# Altium PCB PCB_DA1_FIN_2023-05-31.pcbdoc
Units mil, origin at the board's own origin, x right, y up, seen from the top; angles counter-clockwise.
Board outline 3710.94 x 3713.54 mil, 2 copper layers (Top Layer, Bottom Layer); 16 components, 29 nets, 83 pads, 28 vias.
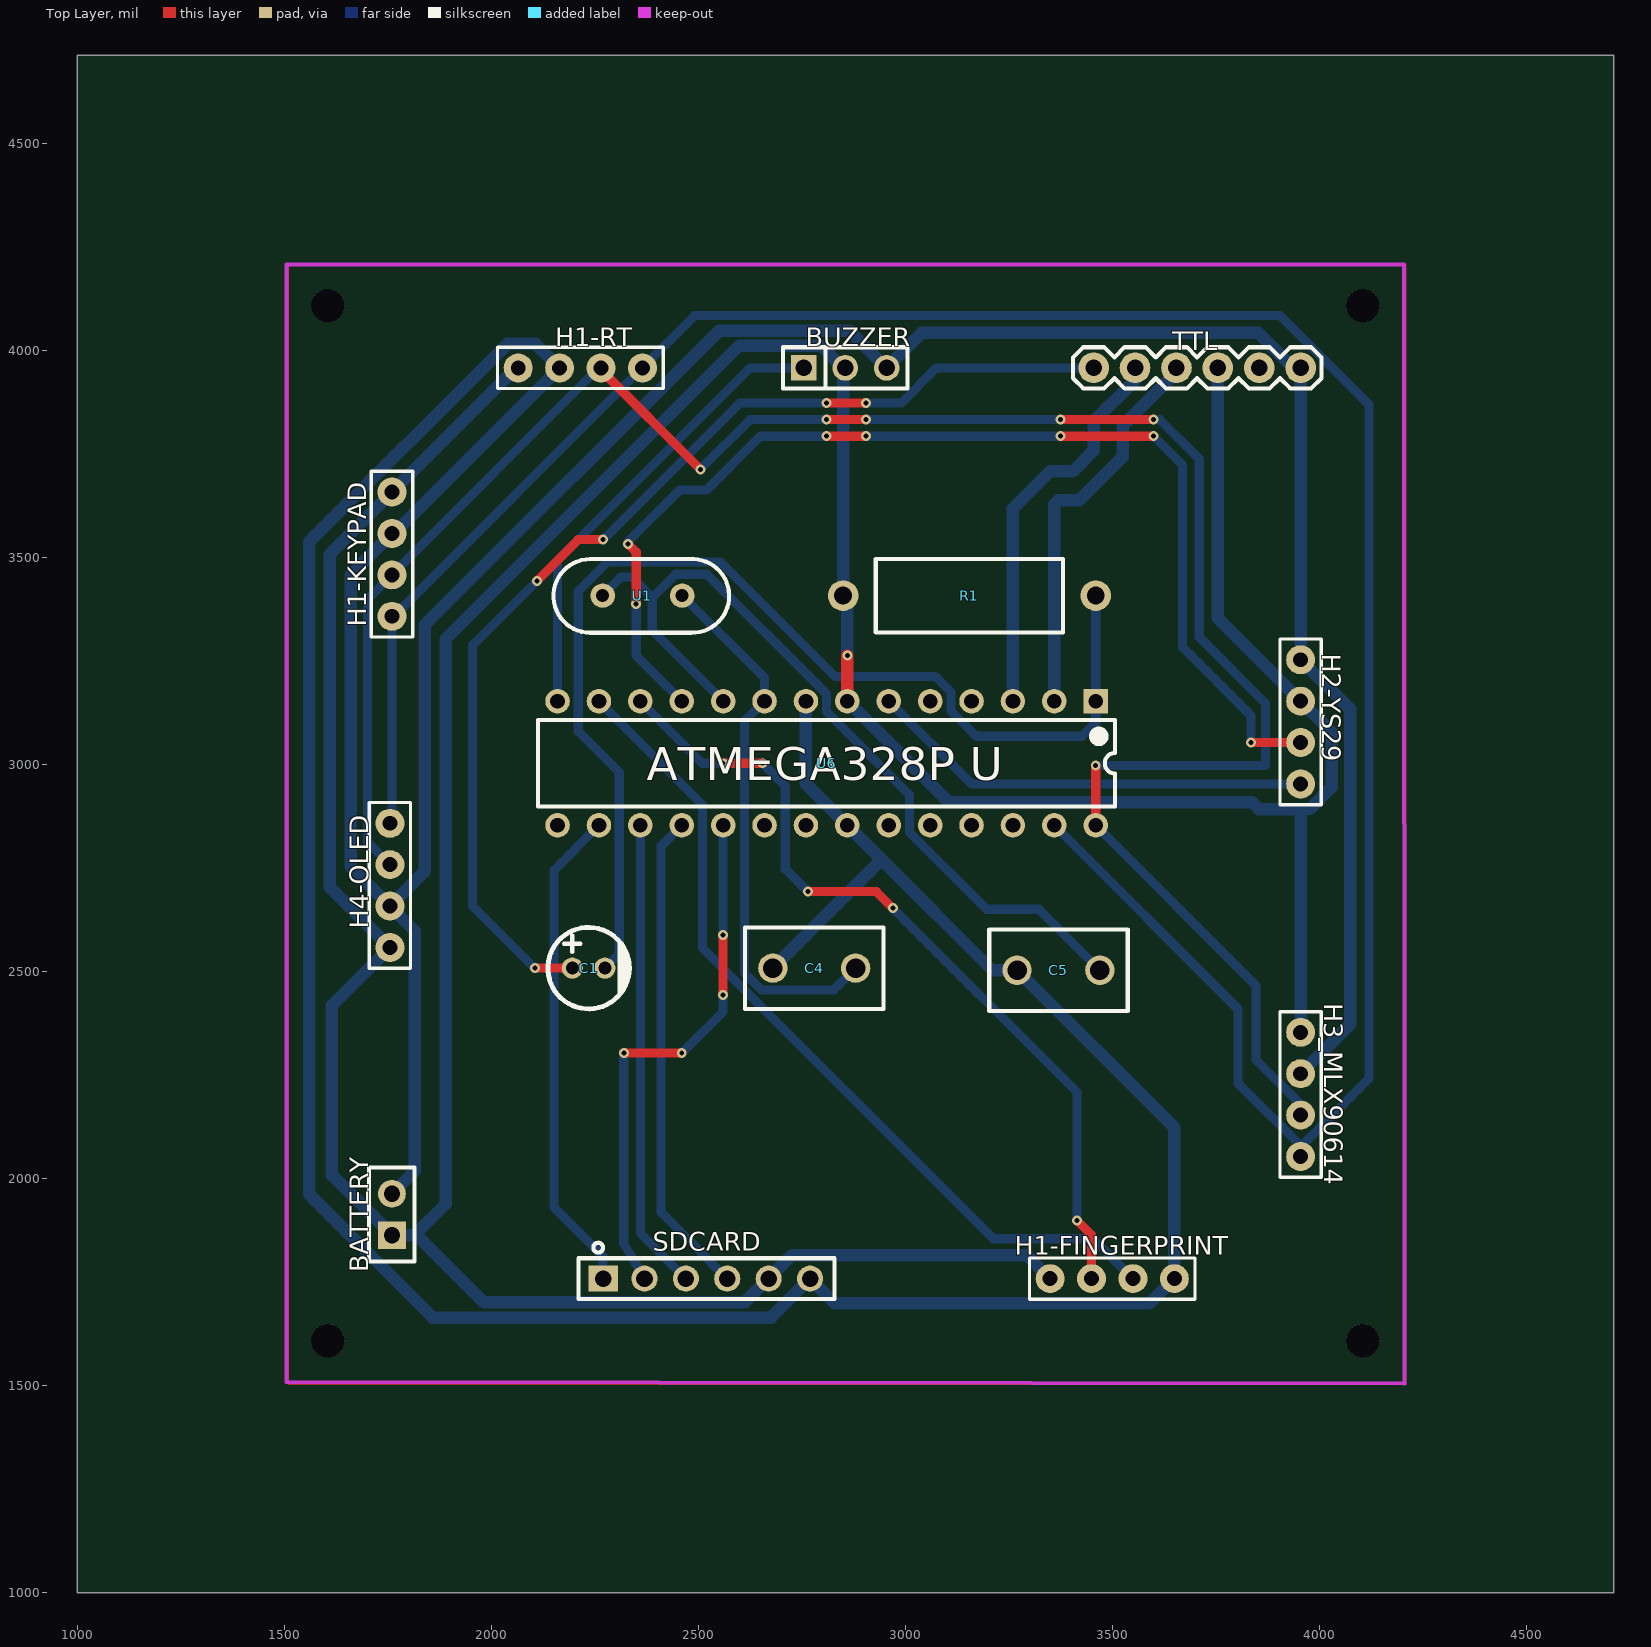
[diagram p0: Top Layer view]
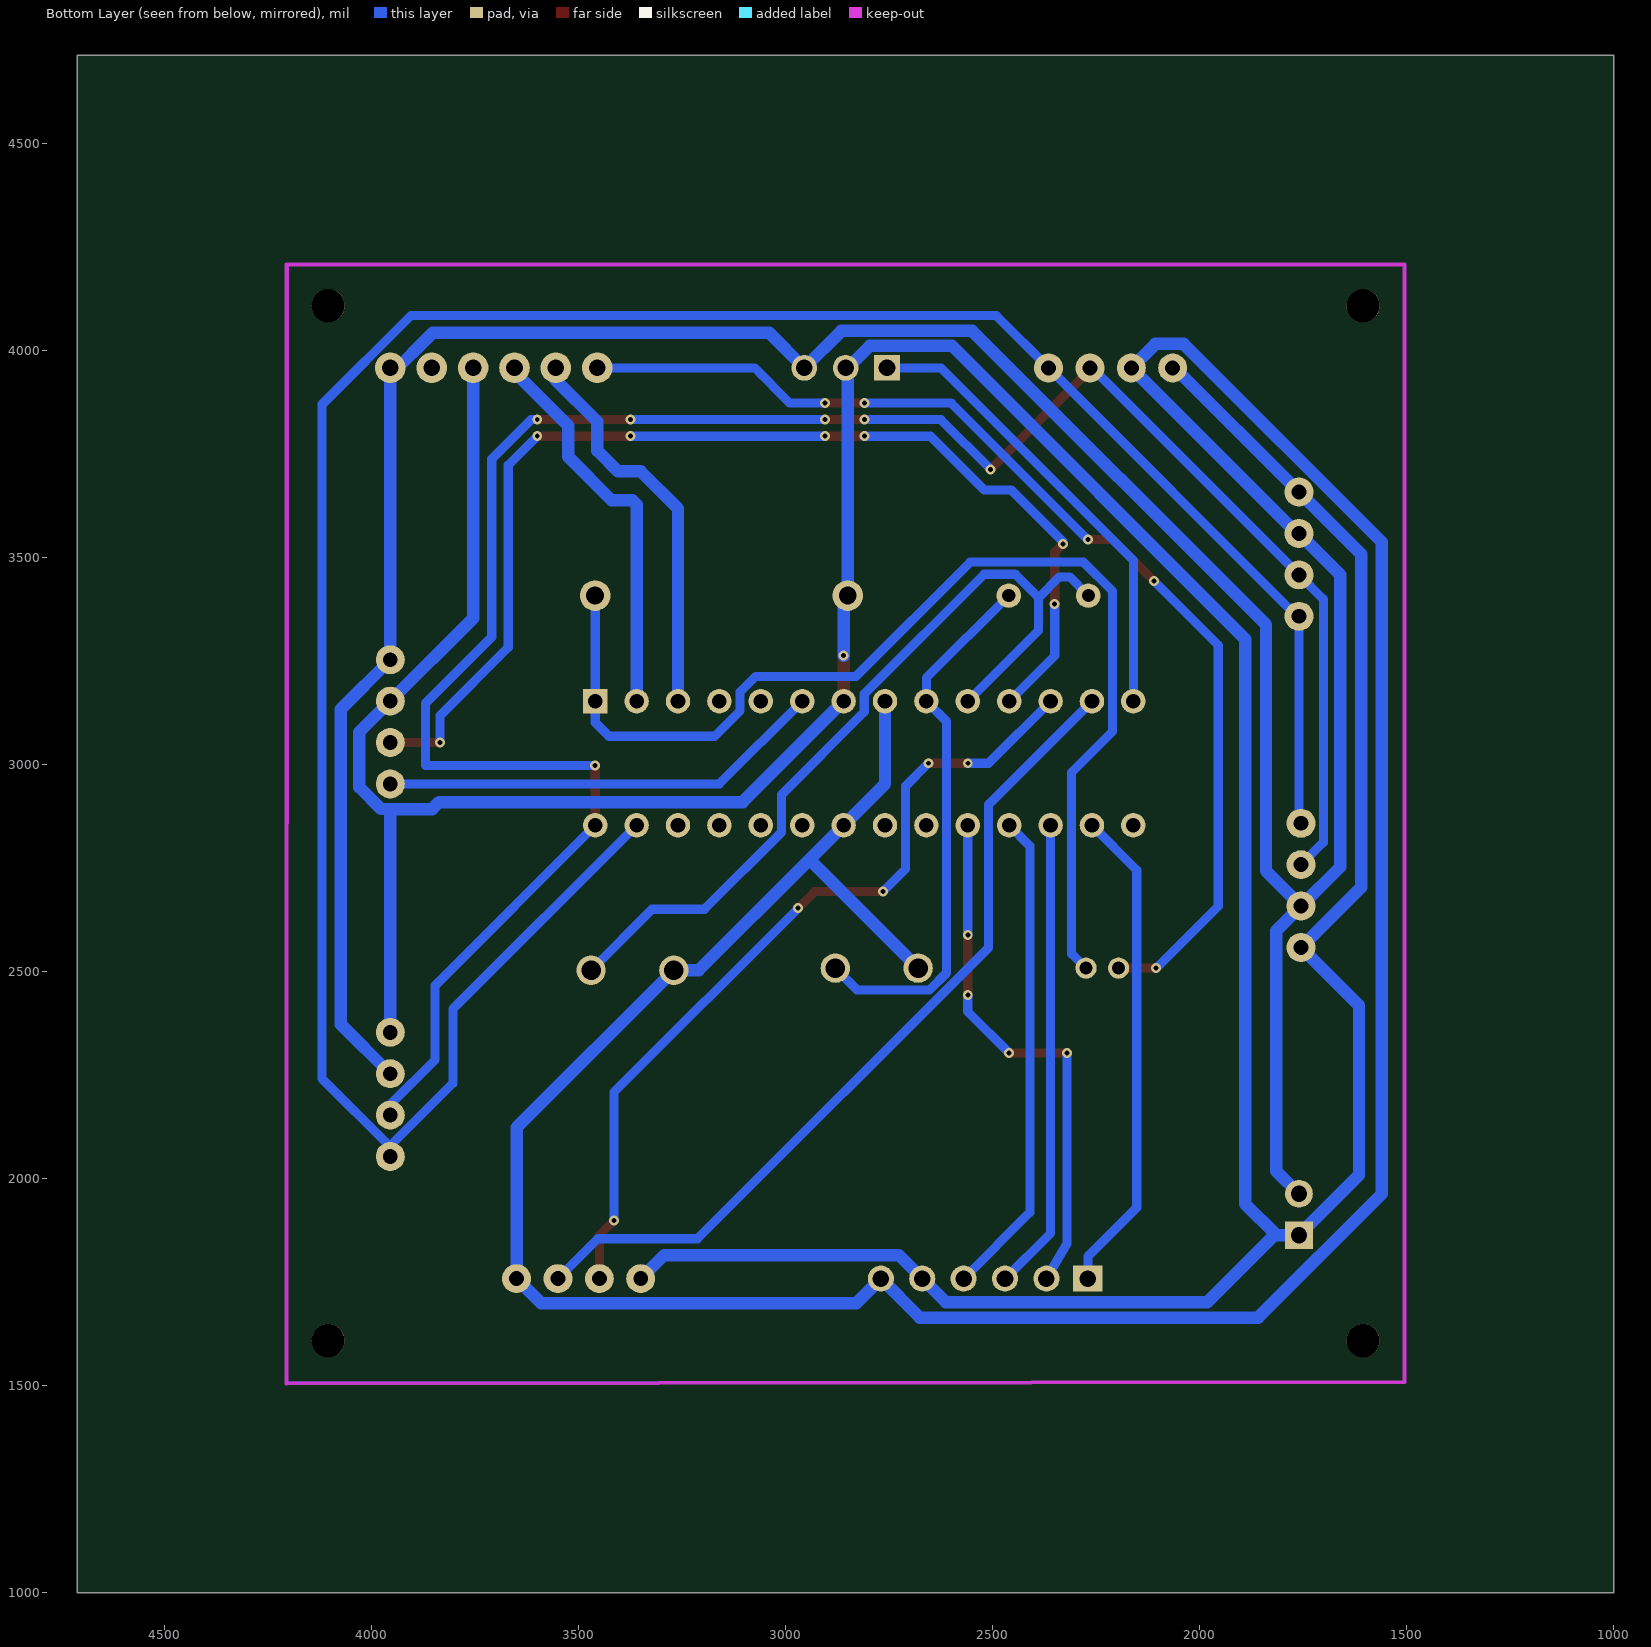
[diagram p1: Bottom Layer view, seen from below]

## Layer stack, top to bottom
Top Layer: signal copper (thickness not stored)
Dielectric: dielectric 12.6, FR-4, Dk 4.8
Bottom Layer: signal copper (thickness not stored)

## Board outline
4710.94,1000 1000,1000 1000,4713.54 4710.94,4713.54

## Components (designator, comment, footprint, x,y, rotation, side; value= is the part's Value field where it differs from the comment)
BATTERY "Header-Female-2.54_1x2" HDR-TH_2P-P2.54-V-F 1760,1913.54 r90 top
BUZZER "Header-Female-2.54_1x3" HDR-TH_3P-P2.54-V-F 2855,3958.54 r0 top
C1 "100nF" CAP-TH_BD5.0-P2.00-D0.8-FD 2235,2508.54 r0 top
C4 "22pF" CAP-TH_L8.5-W5.0-P5.00-D1.2 2780,2508.54 r0 top
C5 "22pF" CAP-TH_L8.5-W5.0-P5.00-D1.2 3370,2503.54 r0 top
H1-FINGERPRINT "HEADER-FEMALE-2.54_1X4 CP" "HEADER - HEADER-FEMALE-2.54_1X4" 3450,1758.54 r0 top
H1-KEYPAD "HEADER-FEMALE-2.54_1X4 CP" "HEADER - HEADER-FEMALE-2.54_1X4" 1760,3558.54 r270 top
H1-RT "HEADER-FEMALE-2.54_1X4 CP" "HEADER - HEADER-FEMALE-2.54_1X4" 2165,3958.54 r0 top
H2-YS29 "HEADER-FEMALE-2.54_1X4 CP" "HEADER - HEADER-FEMALE-2.54_1X4" 3955,3153.54 r270 top
H3_MLX90614 "HEADER-FEMALE-2.54_1X4 CP" "HEADER - HEADER-FEMALE-2.54_1X4" 3955,2253.54 r270 top
H4-OLED "HEADER-FEMALE-2.54_1X4 CP" "HEADER - HEADER-FEMALE-2.54_1X4" 1755,2658.54 r90 top
R1 "10kΩ" RES-TH_BD4.5-L11.5-P15.50-D0.7 3155,3408.54 r0 top
SDCARD "Header-Female-2.54_1x6" HDR-TH_6P-P2.54-V-F 2520,1758.54 r0 top
TTL "FTDI_BASIC" FTDI_BASIC 3455,3958.54 r0 top
U1 "16MHz" CRYSTAL-TH_L10.8-W4.5-P4.88 2365,3408.54 r0 top
U6 "ATmega328PU" "DIP-28 ATMEGA328P U" 2160,2853.54 r0 top

## Footprints (in the part's own frame and the unit in brackets; to place one, negate y for a bottom-side part, rotate by r counter-clockwise, add the part's x,y. Pads: shape width x height; smd on the part's side, far side on the other; paste and mask are expansions set on the pad)
CAP-TH_BD5.0-P2.00-D0.8-FD [mm]
  round 1.3 hole 0.8: 1(-1,0) 2(1,0)
  silkscreen extent -2.5,-2.5 2.5,2.5
CAP-TH_L8.5-W5.0-P5.00-D1.2 [mm]
  round 1.8 hole 1.2: 1(-2.54,0) 2(2.54,0)
  silkscreen extent -4.25,-2.5 4.25,2.5
CRYSTAL-TH_L10.8-W4.5-P4.88 [mm]
  round 1.5 hole 0.8: 1(-2.44,0) 2(2.44,0)
  silkscreen extent -5.46,-2.28 5.32,2.24
"DIP-28 ATMEGA328P U" [mm]
  rect 1.5x1.5 hole 0.9: 1(33.02,7.62)
  round 1.5 hole 0.9: 2(30.48,7.62) 3(27.94,7.62) 4(25.4,7.62) 5(22.86,7.62) 6(20.32,7.62) 7(17.78,7.62) 8(15.24,7.62) 9(12.7,7.62) 10(10.16,7.62) 11(7.62,7.62) 12(5.08,7.62) 13(2.54,7.62) 14(0,7.62) 15(0,0) 16(2.54,0) 17(5.08,0) 18(7.62,0) 19(10.16,0) 20(12.7,0) 21(15.24,0) 22(17.78,0) 23(20.32,0) 24(22.86,0) 25(25.4,0) 26(27.94,0) 27(30.48,0) 28(33.02,0)
  silkscreen extent -1.19,1.16 34.21,6.46
FTDI_BASIC [mil]
  round 74 hole 40: CTS(400,0) DTR(0,0) GND(500,0) RXI(100,0) TXO(200,0) VCC(300,0)
  silkscreen extent -50,-50 550,50
HDR-TH_2P-P2.54-V-F [mm]
  rect 1.7x1.7 hole 1: 1(-1.27,0)
  round 1.7 hole 1: 2(1.27,0)
  silkscreen extent -2.88,-1.39 2.88,1.4
HDR-TH_3P-P2.54-V-F [mil]
  rect 62x62 hole 40.16: 1(-100,0)
  round 62 hole 40.16: 2(0,0) 3(100,0)
  silkscreen extent -150,-50 150,50
HDR-TH_6P-P2.54-V-F [mm]
  rect 1.8x1.6 hole 1.02: 1(-6.35,0)
  round 1.6 hole 1.02: 2(-3.81,0) 3(-1.27,0) 4(1.27,0) 5(3.81,0) 6(6.35,0)
  silkscreen extent -7.85,-1.25 7.85,2.2
"HEADER - HEADER-FEMALE-2.54_1X4" [mil]
  round 70 hole 36: 1(-100,0) 2(0,0) 3(100,0) 4(200,0)
  silkscreen extent -150,-50 250,50
RES-TH_BD4.5-L11.5-P15.50-D0.7 [mil]
  round 74 hole 43.31: 1(-305.12,0) 2(305.12,0)
  silkscreen extent -226,-89 226,89

## Free pads (board coordinates)
  round 80 hole 80 unplated: ""(1605,1608.54) ""(1605,4108.54) ""(4105,1608.54) ""(4105,4108.54)

## Via types
v1: diameter 24, hole 12, Top Layer to Bottom Layer, tented both sides, 28 vias

## Nets (pads, with @x,y where several pads share a name; then routed paths per layer and width w, separated by ;. In a path a pad name is that pad's centre, name@x,y a point inside that pad or via, vN(x,y) a via of type N, cw(c..) or ccw(c..) an arc to the next point about the centre after c; other vN are vias at no path point)
+5V: BATTERY.1 BUZZER.2 H1-FINGERPRINT.1 H1-KEYPAD.1 H1-RT.1 H2-YS29.2 H3_MLX90614.1 H4-OLED.1 R1.1 SDCARD.5 TTL.VCC U6.7 | length 10719.1
  Top Layer w30: U6.7 v1(2860,3263.54)
  Bottom Layer w30: 1814.5,1863.54 1890,1939.04 1890,3303.54 2598.5,4012.04 2796.3,4012.04 BUZZER.2@2849.9,3958.54 ; H1-RT.1 2060,3958.54 H1-KEYPAD.1 1610,3508.54 1610,2703.54 H4-OLED.1 1615,2418.54 1615,2008.54 BATTERY.1 1778.26,1863.54 1808.01,1863.54 1814.54,1863.54 1819.5,1863.54 1981.35,1701.69 2613.15,1701.69 SDCARD.5 2726.74,1815.28 3293.26,1815.28 H1-FINGERPRINT.1 ; BUZZER.2 BUZZER.2@2849.88,3958.54 ; U6.7 3103.92,2909.62 3837.33,2909.62 3854.05,2892.9 3955,2892.9 H3_MLX90614.1 ; v1(2860,3263.54) 2860,3398.42 R1.1 BUZZER.2@2849.88,3958.54 ; TTL.VCC 3755,3353.54 H2-YS29.2 4030,3078.54 4030,2945.64 3977.3,2892.94 3955,2892.94
AREF: U6.21
AVCC: U6.20
DTR: C1.1 TTL.DTR | length 3118.6
  Top Layer w22: v1(2105,2508.54) C1.1 ; v1(2110,3443.54) 2210,3543.54 v1(2270,3543.54) ; v1(2810,3873.54) v1(2905,3873.54)
  Bottom Layer w22: v1(2105,2508.54) 1955,2658.54 1955,3288.54 v1(2110,3443.54) ; v1(2270,3543.54) 2600,3873.54 v1(2810,3873.54) ; v1(2905,3873.54) 2990,3873.54 3075,3958.54 ; 3055,3938.54 3075,3958.54 ; 3075,3958.54 TTL.DTR 3075,3958.54
GND: BATTERY.2 BUZZER.3 C4.1 C5.1 H1-FINGERPRINT.4 H1-KEYPAD.2 H1-RT.2 H2-YS29.1 H3_MLX90614.2 H4-OLED.2 SDCARD.6 TTL.GND U6.8 U6.22 | length 14215.4
  Bottom Layer w30: BATTERY.2 1815.04,2018.58 1815.04,2598.5 H4-OLED.2 ; C4.1 2942.5,2771.04 ; U6.8 2760,2953.54 U6.22 2942.5,2771.04 ; H3_MLX90614.2 4075,2373.54 4075,3133.54 H2-YS29.1 TTL.GND@3955,3936.87 ; TTL.GND TTL.GND@3955,3936.87 ; H4-OLED.2 1839.7,2743.24 1839.7,3338.24 2549.6,4048.14 2865.4,4048.14 BUZZER.3 3040,4043.54 3852.2,4043.54 3955,3940.74 TTL.GND@3955,3936.84 ; H4-OLED.2 1660,2753.54 1660,3458.54 H1-KEYPAD.2 1765,3558.54 H1-RT.2 2106.9,4016.64 2038.6,4016.64 1560,3538.04 1560,1963.14 1858.6,1664.54 2676,1664.54 SDCARD.6 2829.27,1699.27 3590.73,1699.27 H1-FINGERPRINT.4 3650,2123.54 C5.1 3210,2503.54 2942.5,2771.04
JP1-FT232RL_CTS: TTL.CTS
PB0: BUZZER.1 U6.14 | length 1127.6
  Bottom Layer w22: U6.14 2160,3493.54 2625,3958.54 BUZZER.1
PB1: U6.15
PB2: SDCARD.1 U6.16 | length 1188.8
  Bottom Layer w22: U6.16 2151.74,2745.28 2151.74,1930.33 2270,1812.07 SDCARD.1
PB3: SDCARD.3 U6.17 | length 1140.6
  Bottom Layer w22: U6.17 2360,1868.54 SDCARD.3
PB4: SDCARD.4 U6.18 | length 1182
  Bottom Layer w22: U6.18 2410,2803.54 2410,1918.54 SDCARD.4
PB5: SDCARD.2 U6.19 | length 1290
  Top Layer w22: v1(2320,2303.54) v1(2460,2303.54) ; v1(2560,2443.54) v1(2560,2588.54)
  Bottom Layer w22: v1(2320,2303.54) 2320,1843.54 SDCARD.2 ; v1(2460,2303.54) 2560,2403.54 v1(2560,2443.54) ; v1(2560,2588.54) U6.19
PC0: U6.23
PC1: U6.24
PC2: U6.25
PC3: U6.26
PD2: U6.4
PD3: U6.5
PD4: H2-YS29.4 U6.6 | length 1077.8
  Bottom Layer w22: U6.6 3160,2953.54 H2-YS29.4
PD5: H2-YS29.3 U6.11 | length 2766.8
  Top Layer w22: v1(2330,3533.54) 2350,3513.54 v1(2350,3388.54) ; v1(2810,3793.54) v1(2905,3793.54) ; v1(3375,3793.54) v1(3600,3793.54) ; v1(3835,3053.54) H2-YS29.3
  Bottom Layer w22: v1@2330,3538.54 2455,3663.54 2520,3663.54 2650,3793.54 v1(2810,3793.54) ; v1(2350,3388.54) 2350,3263.54 U6.11 ; v1(2905,3793.54) v1(3375,3793.54) ; v1(3600,3793.54) 3670,3723.54 3670,3283.54 3835,3118.54 v1(3835,3053.54)
PD6: H1-FINGERPRINT.2 U6.12 | length 2028.1
  Top Layer w22: v1(2560,3003.54) v1(2655,3003.54) ; v1(2765,2693.54) 2930,2693.54 v1(2970,2653.54) ; v1(3415,1898.54) 3450,1863.54 H1-FINGERPRINT.2
  Bottom Layer w22: U6.12 2510,3003.54 v1(2560,3003.54) ; v1(2655,3003.54) 2710,2948.54 2710,2748.54 v1(2765,2693.54) ; v1(2970,2653.54) 3415,2208.54 v1(3415,1898.54)
PD7: H1-FINGERPRINT.3 U6.13 | length 2070.3
  Bottom Layer w22: U6.13 2509.98,2903.56 2509.98,2557.92 3213.09,1854.81 3453.73,1854.81 H1-FINGERPRINT.3
SCL: H1-KEYPAD.3 H1-RT.3 H3_MLX90614.3 H4-OLED.3 U6.28 | length 5364.6
  Top Layer w22: H1-RT.3 2265,3953.54 v1(2505,3713.54) ; v1(2810,3833.54) v1(2905,3833.54) ; v1(3375,3833.54) v1(3600,3833.54) ; U6.28 v1(3460,2998.54)
  Bottom Layer w22: H4-OLED.3 1701.18,2812.36 1701.18,3399.72 H1-KEYPAD.3 2260,3958.54 H1-RT.3 ; v1(2505,3713.54) 2625,3833.54 v1(2810,3833.54) ; v1(2905,3833.54) v1(3375,3833.54) ; U6.28 3846.79,2466.75 3846.79,2287.37 3956.27,2177.89 3955,2176.62 H3_MLX90614.3 ; v1(3460,2998.54) 3870,2998.54 3870,3148.54 3710,3308.54 3710,3738.54 3615,3833.54 v1(3600,3833.54)
SDA: H1-KEYPAD.4 H1-RT.4 H3_MLX90614.4 H4-OLED.4 U6.27 | length 6159.1
  Bottom Layer w22: H4-OLED.4 1760,2863.54 H1-KEYPAD.4 1765,3358.54 H1-RT.4 2491.1,4084.64 3905.4,4084.64 4120,3870.04 4120,2241.64 H3_MLX90614.4@3956.3,2077.94 ; U6.27 3803.65,2409.89 3803.65,2230.51 3956.27,2077.89 3955,2076.62 H3_MLX90614.4
U6_1: C1.2 R1.2 U6.1 | length 2766.1
  Bottom Layer w22: C1.2 2309.1,2543.24 2309.1,2981.54 2210,3080.64 2210,3418.74 2280.5,3489.24 2554.3,3489.24 2830,3213.54 3072.2,3213.54 3110,3175.74 3110,3130.24 3171.6,3068.64 3426.7,3068.64 3460,3101.94 ; 3460,3101.98 U6.1 3460,3408.42 R1.2
U6_2: TTL.TXO U6.2 | length 956.5
  Bottom Layer w30: U6.2 3360,3628.54 3370,3638.54 3420,3638.54 3525,3743.54 3525,3818.54 3655,3948.54 TTL.TXO
U6_3: TTL.RXI U6.3 | length 959.4
  Bottom Layer w30: U6.3 3260,3618.54 3350,3708.54 3405,3708.54 3455,3758.54 3455,3828.54 3555,3928.54 TTL.RXI
U6_9: C4.2 U1.2 U6.9 | length 1321.3
  Bottom Layer w22: U1.2 2660,3209.6 U6.9 2611.48,3105.02 2611.48,2496.88 2652.32,2456.04 2827.5,2456.04 C4.2
U6_10: C5.2 U1.1 U6.10 | length 2059.4
  Bottom Layer w22: U1.1 2313.9,3453.54 2338.8,3453.54 2388.8,3403.54 ; U6.10 2388.84,3324.7 2388.84,3403.58 2445.43,3460.17 2520.53,3460.17 2810,3170.7 2810,3127.84 3010,2927.84 3010,2836.95 3196.2,2650.75 3322.79,2650.75 C5.2

## Polygon pours and split planes (outlines as drawn)
GND on Bottom Layer (solid): 4205,4208.54 1505,4208.54 1505,1508.54 4200,1508.54 4205,1503.54
GND on Top Layer (solid): 4210,4208.54 1510,4208.54 1510,1503.54 4210,1503.54

## Text inside footprints (layer, text, board x,y; h text height)
TTL: Document "GRN" at 3415,3863.54 h30; Document "BLK" at 3920,3853.54 h30
U6: Top Overlay "ATMEGA328P U" at 2375.93,2962.28 h80